# EAGLE board boarduino 4 relay board (EAGLE 5.11)
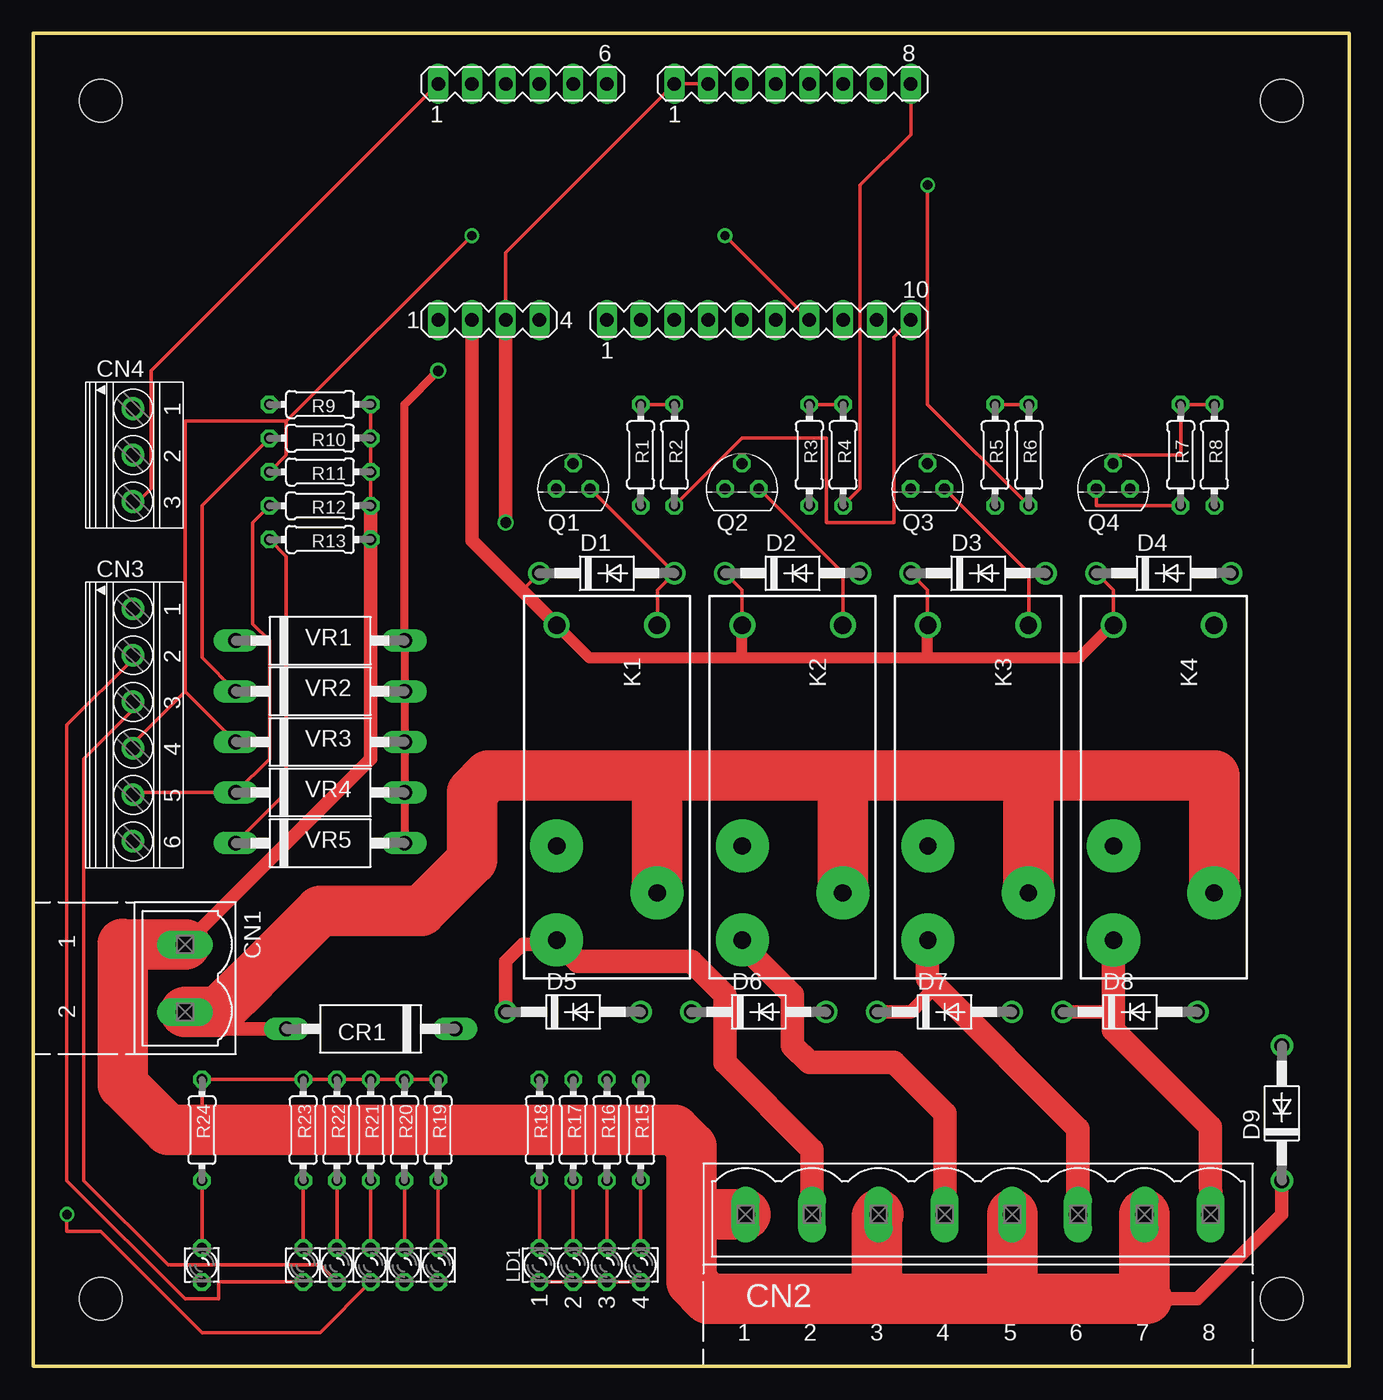
[diagram p0: board, top side]
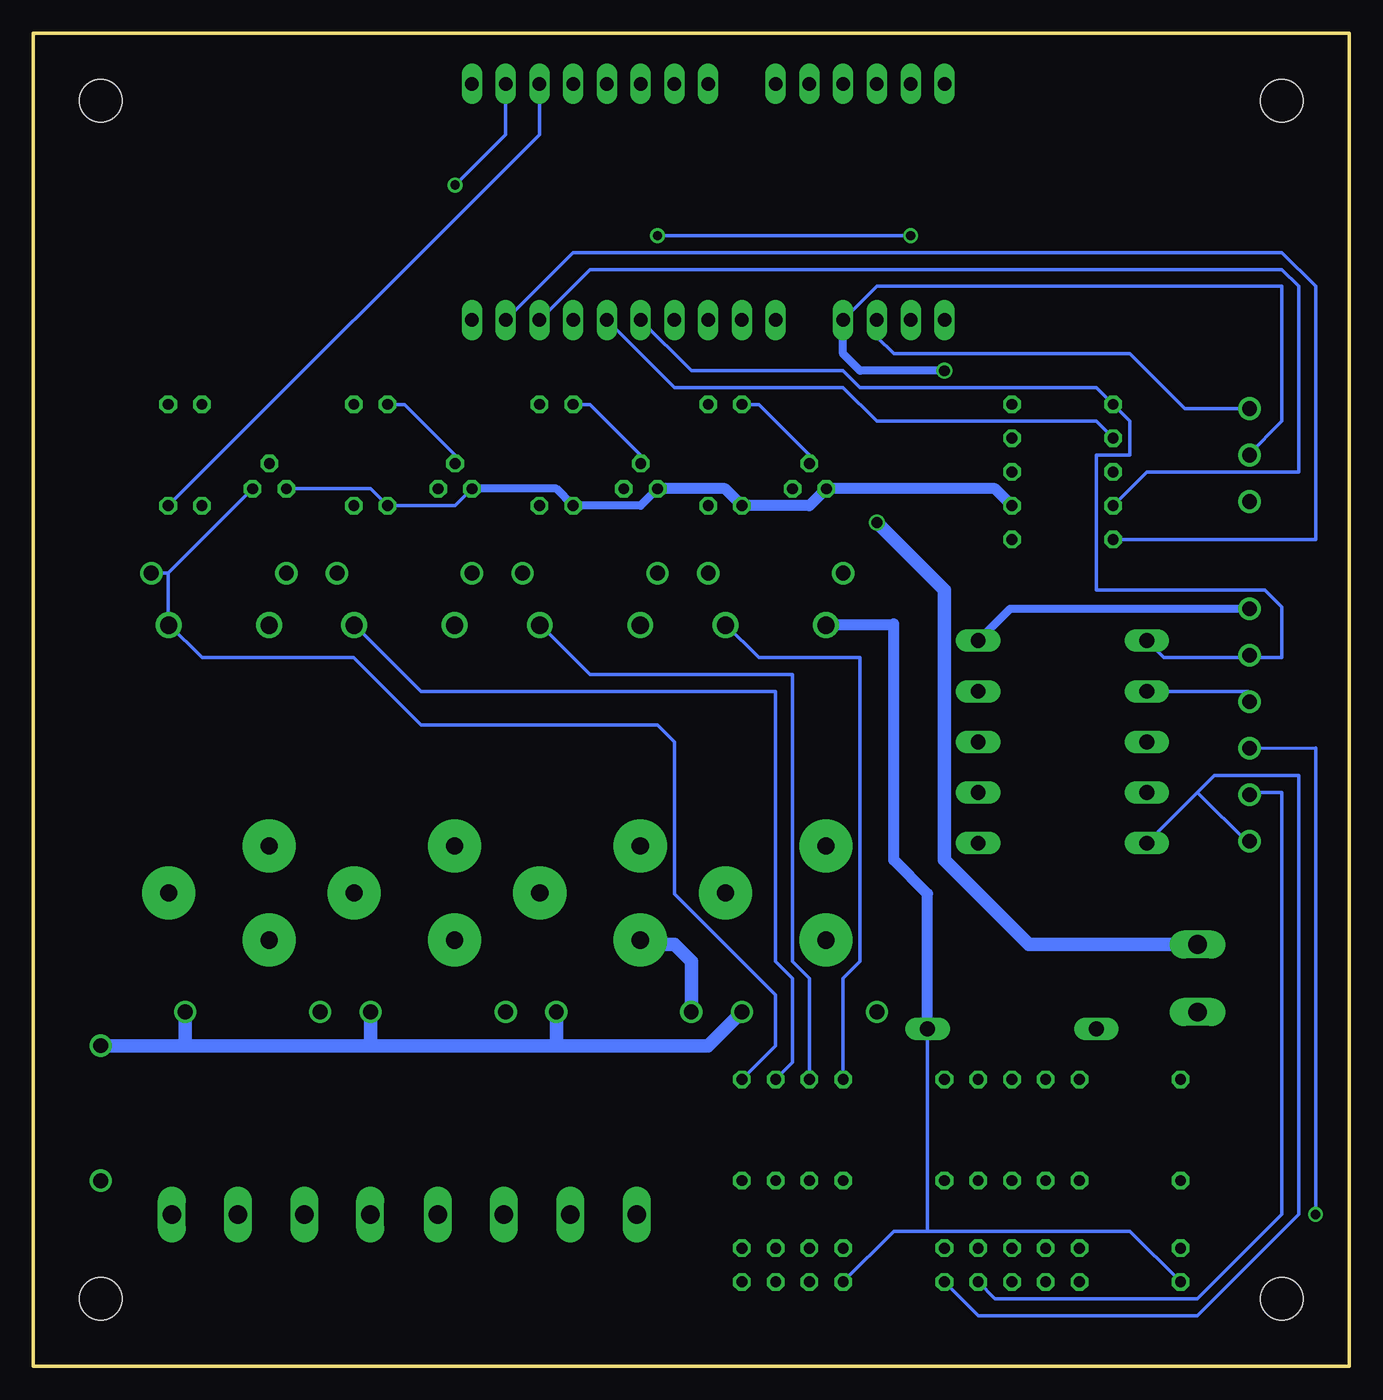
[diagram p1: board, bottom side, seen from below]

Size 99.06 x 100.33 mm. Coordinates in mm from the lower left corner, seen from the top.
Outline: 0,100.33 99.06,100.33 99.06,0 0,0 0,100.33
Copper layers (1*16): Top 0.035mm / dielectric 1.5mm / Bottom 0.035mm
Design rules "default": minimum track width 10mil, minimum drill 24mil, track to track 8mil, track to pad 8mil, pad to pad 8mil, via to via 8mil, smd to smd 8mil, copper to edge 40mil, drill to drill 8mil, minimum pad ring 10mil, minimum via ring 8mil, stop-mask expansion 4mil, vias tented up to drill 0mil, thermal gap 10mil
Holes 3.2 mm at 5.08,5.08 93.98,5.08 93.98,95.25 5.08,95.25

## Footprints (pad centres in the part's own frame; a part is rotated, then mirrored left to right if it is on the bottom)
MSTBV2R = drill 1.397 long: 1 -2.54,0; 2 2.54,0
MSTBV8R = drill 1.397 long: 1 -17.5,0; 2 -12.496,0; 3 -7.492,0; 4 -2.514,0; 5 2.566,0; 6 7.519,0; 7 12.523,0; 8 17.501,0
1751280 = drill 1.1 pad 1.7 round: 1 -8.75,-0.1; 2 -5.25,-0.1; 3 -1.75,-0.1; 4 1.75,-0.1; 5 5.25,-0.1; 6 8.75,-0.1
1751251 = drill 1.1 pad 1.7 round: 1 -3.5,-0.1; 2 0,-0.1; 3 3.5,-0.1
DO15-12 = drill 1.118 long: A 6.35,0; C -6.35,0
DO41-10 = drill 1.118 round: A 5.08,0; C -5.08,0
MA04-1 = drill 1.016 long: 1 -3.81,0; 2 -1.27,0; 3 1.27,0; 4 3.81,0
MA10-1 = drill 1.016 long: 1 -11.43,0; 2 -8.89,0; 3 -6.35,0; 4 -3.81,0; 5 -1.27,0; 6 1.27,0; 7 3.81,0; 8 6.35,0; 9 8.89,0; 10 11.43,0
MA06-1 = drill 1.016 long: 1 -6.35,0; 2 -3.81,0; 3 -1.27,0; 4 1.27,0; 5 3.81,0; 6 6.35,0
MA08-1 = drill 1.016 long: 1 -8.89,0; 2 -6.35,0; 3 -3.81,0; 4 -1.27,0; 5 1.27,0; 6 3.81,0; 7 6.35,0; 8 8.89,0
LZR181 = drill 0.813 octagon: A -1.27,0; K 1.27,0
RT-C/O12A3.5 = drill 1.3 pad 4 round: 11 7.56,3.78; 12 4.02,-3.78; 14 11.1,-3.78 | drill 1.3 round: A1 -12.6,-3.78; A2 -12.6,3.78
LZR184 = drill 0.813 octagon: A1 -1.27,3.81; A2 -1.27,1.27; A3 -1.27,-1.27; A4 -1.27,-3.81; K1 1.27,3.81; K2 1.27,1.27; K3 1.27,-1.27; K4 1.27,-3.81
TO92 = drill 0.813 octagon: 1 1.27,0; 2 0,1.905; 3 -1.27,0
0204/7 = drill 0.813 octagon: 1 -3.81,0; 2 3.81,0

## Placement (x,y rotation side)
CN1  PWR  [MSTBV2R]  11.43,29.21 270 top
CN2  RELAYS  [MSTBV8R]  71.12,11.43 0 top
CN3  INPUTS  [1751280]  7.62,48.26 270 top
CN4  POT  [1751251]  7.62,68.58 270 top
CR1  [DO15-12]  25.4,25.4 180 top
D1  [DO41-10]  43.18,59.69 0 top
D2  [DO41-10]  57.15,59.69 0 top
D3  [DO41-10]  71.12,59.69 0 top
D4  [DO41-10]  85.09,59.69 0 top
D5  [DO41-10]  40.64,26.67 0 top
D6  [DO41-10]  54.61,26.67 0 top
D7  [DO41-10]  68.58,26.67 0 top
D8  [DO41-10]  82.55,26.67 0 top
D9  [DO41-10]  93.98,19.05 90 top
E$1  [MA04-1]  34.29,78.74 0 top
E$2  [MA10-1]  54.61,78.74 0 top
E$3  [MA06-1]  36.83,96.52 0 top
E$4  [MA08-1]  57.15,96.52 0 top
E$8  [LZR181]  27.94,7.62 90 top
E$9  [LZR181]  30.48,7.62 90 top
E$10  [LZR181]  25.4,7.62 90 top
E$13  [LZR181]  22.86,7.62 90 top
E$14  [LZR181]  20.32,7.62 90 top
E$19  [LZR181]  12.7,7.62 90 top
K1  [RT-C/O12A3.5]  43.18,43.18 270 top
K2  [RT-C/O12A3.5]  57.15,43.18 270 top
K3  [RT-C/O12A3.5]  71.12,43.18 270 top
K4  [RT-C/O12A3.5]  85.09,43.18 270 top
LD1  [LZR184]  41.91,7.62 90 top
Q1  [TO92]  40.64,66.04 0 top
Q2  [TO92]  53.34,66.04 0 top
Q3  [TO92]  67.31,66.04 0 top
Q4  [TO92]  81.28,66.04 0 top
R1  [0204/7]  45.72,68.58 90 top
R2  [0204/7]  48.26,68.58 90 top
R3  [0204/7]  58.42,68.58 90 top
R4  [0204/7]  60.96,68.58 90 top
R5  [0204/7]  72.39,68.58 90 top
R6  [0204/7]  74.93,68.58 90 top
R7  [0204/7]  86.36,68.58 90 top
R8  [0204/7]  88.9,68.58 90 top
R9  [0204/7]  21.59,72.39 0 top
R10  [0204/7]  21.59,69.85 0 top
R11  [0204/7]  21.59,67.31 0 top
R12  [0204/7]  21.59,64.77 0 top
R13  [0204/7]  21.59,62.23 0 top
R15  [0204/7]  45.72,17.78 90 top
R16  [0204/7]  43.18,17.78 90 top
R17  [0204/7]  40.64,17.78 90 top
R18  [0204/7]  38.1,17.78 90 top
R19  [0204/7]  30.48,17.78 90 top
R20  [0204/7]  27.94,17.78 90 top
R21  [0204/7]  25.4,17.78 90 top
R22  [0204/7]  22.86,17.78 90 top
R23  [0204/7]  20.32,17.78 90 top
R24  [0204/7]  12.7,17.78 90 top
VR1  [DO15-12]  21.59,54.61 0 top
VR2  [DO15-12]  21.59,50.8 0 top
VR3  [DO15-12]  21.59,46.99 0 top
VR4  [DO15-12]  21.59,43.18 0 top
VR5  [DO15-12]  21.59,39.37 0 top

## Library data of the parts
CN1 CN2 = con-phoenix-500
CN3 CN4 = con-phoenix-350
CR1 D1-D9 VR1-VR5 = diode
E$1-E$4 = con-lstb
E$8-E$10 E$13 E$14 E$19 LD1 = led
K1-K4 = relay
Q1-Q4 = transistor
R1-R13 R15-R24 = resistor

## Nets
S$1: CN3.2 E$2.5 E$14.A R9.1 VR1.C
S$2: Q1.2 R1.2 R2.2
S$3: E$2.10 R2.1
S$4: D1.A K1.A2 Q1.1 R18.2
S$5: D5.A D6.A D7.A D8.A D9.A
S$6: CN1.2 CR1.A K1.11 K2.11 K3.11 K4.11
S$7: Q2.2 R3.2 R4.2
S$8: Q3.2 R5.2 R6.2
S$9: Q4.2 R7.2 R8.2
S$10: E$4.8 R4.1
S$11: E$4.7 R6.1
S$12: E$4.6 R8.1
S$13: D2.A K2.A2 Q2.1 R17.2
S$14: D3.A K3.A2 Q3.1 R16.2
S$15: D4.A K4.A2 Q4.1 R15.2
S$17: CN3.1 CN4.2 E$1.4 VR1.A VR2.A VR3.A VR4.A VR5.A
S$18: CN4.3 E$3.1
S$20: CN1.1 CN2.1 CN2.3 CN2.5 CN2.7 CN4.1 D9.C E$1.3 E$4.1 E$4.2 Q1.3 Q2.3 Q3.3 Q4.3 R1.1 R3.1 R5.1 R7.1 R9.2 R10.2 R11.2 R12.2 R13.2 R19.2 R20.2 R21.2 R22.2 R23.2 R24.2
S$21: CN3.6 E$2.9 E$9.A R13.1 VR5.C
S$22: CN3.3 E$2.6 E$13.A R10.1 VR2.C
S$23: CN3.4 E$2.7 E$10.A R11.1 VR3.C
S$24: CN3.5 E$2.8 E$8.A R12.1 VR4.C
S$25: CR1.C D1.C D2.C D3.C D4.C E$1.2 E$19.A K1.A1 K2.A1 K3.A1 K4.A1 LD1.A1 LD1.A2 LD1.A3 LD1.A4
S$26: LD1.K4 R15.1
S$27: LD1.K3 R16.1
S$28: LD1.K2 R17.1
S$29: LD1.K1 R18.1
S$30: E$9.K R19.1
S$31: E$8.K R20.1
S$32: E$10.K R21.1
S$33: E$13.K R22.1
S$34: E$14.K R23.1
S$36: E$19.K R24.1
S$38: CN2.2 D5.C K1.14
S$39: CN2.4 D6.C K2.14
S$40: CN2.6 D7.C K3.14
S$41: CN2.8 D8.C K4.14

## Tracks (layer width: path | path; a pad name or v marks a point on that pad's centre or on a via)
S$1
  Top 0.254: E$14.A 13.97,6.35 13.97,5.08 11.43,5.08 2.54,13.97 2.54,48.26 7.62,53.34 CN3.2
  Bottom 0.254: VR1.C 13.97,53.34 7.62,53.34 | 7.62,53.34 5.08,53.34 5.08,57.15 6.35,58.42 19.05,58.42 19.05,68.58 16.51,68.58 16.51,71.12 R9.1 19.05,73.66 36.83,73.66 38.1,74.93 49.53,74.93 E$2.5 | CN3.2 7.62,53.34
S$2
  Top 0.254: R1.2 R2.2
  Bottom 0.254: R1.2 44.45,72.39 40.64,68.58 Q1.2
S$3
  Top 0.254: R2.1 53.34,69.85 59.69,69.85 59.69,63.5 64.77,63.5 64.77,77.47 E$2.10
S$4
  Top 0.254: Q1.1 D1.A 46.99,58.42 46.99,55.88 K1.A2
  Bottom 0.254: R18.2 38.1,29.21 36.83,30.48 36.83,53.34 44.45,53.34 46.99,55.88 K1.A2
S$5
  Bottom 1.016: 87.63,24.13 D8.A | 73.66,24.13 D7.A | 73.66,24.13 87.63,24.13 | 59.69,24.13 D6.A | 59.69,24.13 73.66,24.13 | 59.69,24.13 48.26,24.13 D5.A | 87.63,24.13 D9.A
S$6
  Top 0.254: 16.51,29.21 17.78,27.94
  Top 1.016: CR1.A 12.7,25.4 CN1.2
  Top 3.81: CN1.2 13.97,26.67 16.51,29.21 21.59,34.29 29.21,34.29 33.02,38.1 33.02,43.18 34.29,44.45 46.99,44.45 | 46.99,44.45 60.96,44.45 | 60.96,44.45 74.93,44.45 | 74.93,44.45 88.9,44.45 88.9,35.59 | 88.9,35.59 88.9,35.56 | 88.9,35.59 K4.11 | K3.11 74.9,44.42 74.93,44.45 | K2.11 60.93,44.42 60.96,44.45 | K1.11 46.96,44.42 46.99,44.45
S$7
  Top 0.254: R3.2 R4.2
  Bottom 0.254: R3.2 57.15,72.39 53.34,68.58 Q2.2
S$8
  Top 0.254: R5.2 R6.2
  Bottom 0.254: R5.2 71.12,72.39 67.31,68.58 Q3.2
S$9
  Top 0.254: Q4.2 81.28,68.58 86.36,68.58 R7.2 R8.2
S$10
  Top 0.254: R4.1 62.23,66.04 62.23,88.9 66.04,92.71 E$4.8
S$11  (via drill 0.7)
  Top 0.254: R6.1 67.31,72.39 v67.31,88.9
  Bottom 0.254: v67.31,88.9 63.5,92.71 E$4.7
S$12
  Bottom 0.254: R8.1 60.96,92.71 E$4.6
S$13
  Top 0.254: 60.96,59.69 Q2.1 | 60.96,59.69 60.96,55.88 K2.A2 | 60.96,59.69 D2.A
  Bottom 0.254: R17.2 40.64,29.21 41.91,30.48 41.91,52.07 57.15,52.07 60.96,55.88 K2.A2
S$14
  Top 0.254: 74.93,59.69 Q3.1 | 74.93,59.69 74.93,55.88 K3.A2 | 74.93,59.69 D3.A
  Bottom 0.254: K3.A2 74.93,55.88 69.85,50.8 43.18,50.8 43.18,30.48 41.91,29.21 41.91,22.86 R16.2
S$15
  Bottom 0.254: 88.9,59.69 Q4.1 | 88.9,59.69 D4.A | 88.9,55.88 86.36,53.34 74.93,53.34 69.85,48.26 52.07,48.26 50.8,46.99 50.8,35.56 43.18,27.94 43.18,24.13 R15.2 | 88.9,55.88 88.9,59.69 | 88.9,55.88 K4.A2
S$17  (via drill 0.8)
  Top 0.61: VR5.A VR4.A VR3.A VR2.A VR1.A 27.94,72.39 v30.48,74.93
  Bottom 0.254: E$1.4 35.56,81.28 5.08,81.28 5.08,71.12 7.62,68.58 CN4.2
  Bottom 0.61: E$1.4 38.1,76.2 36.83,74.93 v30.48,74.93 | CN3.1 25.54,57.01 VR1.A
S$18
  Top 0.254: CN4.3 7.62,64.77 8.89,66.04 8.89,74.93 E$3.1
S$20  (via drill 0.8)
  Top 0.254: E$4.2 E$4.1 35.56,83.82 E$1.3 | R7.1 80.01,64.77 Q4.3 | R9.2 R10.2 R11.2 R12.2 | 12.7,17.78 R24.2 R23.2 R22.2 R21.2 R20.2 R19.2
  Top 1.016: v35.56,63.5 E$1.3 | R12.2 R13.2 25.4,45.72 CN1.1 | D9.C 93.98,11.43 87.63,5.08 83.82,5.08
  Top 3.81: CN2.7 83.64,5.26 83.82,5.08 73.66,5.08 | CN2.5 73.69,5.11 73.66,5.08 | CN2.3 63.5,11.3 63.5,5.08 | 63.5,5.08 73.66,5.08 | 63.5,5.08 50.8,5.08 49.53,6.35 49.53,11.43 | CN1.1 6.76,31.75 6.74,31.78 6.74,21.2 10.16,17.78 12.7,17.78 48.26,17.78 49.53,16.51 49.53,11.43 | 49.53,11.43 CN2.1
  Bottom 0.254: Q4.3 73.66,66.04 R5.1 67.31,64.77 Q3.3 | CN4.1 12.39,72.08 16.51,76.2 34.29,76.2 35.56,77.47 E$1.3
  Bottom 0.61: Q3.3 59.69,66.04 R3.1 53.34,64.77 Q2.3
  Bottom 0.813: Q2.3 46.99,66.04 R1.1 40.64,64.77 Q1.3 26.67,66.04 R12.2
  Bottom 1.016: v35.56,63.5 30.48,58.42 30.48,38.1 24.13,31.75 CN1.1
S$21
  Top 0.254: R13.1 19.05,60.96 19.05,43.18 VR5.C
  Bottom 0.254: CN3.6 7.62,39.37 11.43,43.18 | 11.43,43.18 VR5.C | E$9.A 27.94,3.81 11.43,3.81 3.81,11.43 3.81,44.45 10.16,44.45 11.43,43.18 | E$2.9 58.42,83.82 5.08,83.82 2.54,81.28 2.54,62.23 R13.1
S$22
  Top 0.254: R10.1 12.7,64.77 12.7,53.34 VR2.C | E$13.A 21.59,7.62 10.16,7.62 3.81,13.97 3.81,45.72 7.62,49.53 CN3.3
  Bottom 0.254: VR2.C 7.62,50.8 CN3.3 | E$2.6 50.8,73.66 38.1,73.66 35.56,71.12 19.05,71.12 R10.1
S$23  (via drill 0.7)
  Top 0.254: R11.1 19.05,68.58 19.05,71.12 | 19.05,71.12 11.43,71.12 11.43,50.8 | 11.43,50.8 VR3.C | 11.43,50.8 7.62,46.99 CN3.4 | 19.05,71.12 v33.02,85.09 | v52.07,85.09 E$2.7 | E$10.A 21.59,2.54 12.7,2.54 5.08,10.16 2.54,10.16 v2.54,11.43
  Bottom 0.254: v33.02,85.09 v52.07,85.09 | v2.54,11.43 2.54,46.53 CN3.4
S$24
  Top 0.254: R12.1 16.51,63.5 16.51,55.88 17.78,54.61 17.78,45.72 VR4.C 7.62,43.18 CN3.5
  Bottom 0.254: E$8.A 26.67,5.08 11.43,5.08 5.08,11.43 5.08,43.18 7.62,43.18 CN3.5 | E$2.8 57.15,82.55 5.08,82.55 3.81,81.28 3.81,67.31 15.24,67.31 R12.1
S$25
  Top 0.254: LD1.A1 LD1.A2 LD1.A3 LD1.A4 | D4.C 81.28,58.42 81.28,55.88 K4.A1 | D3.C 67.31,58.42 67.31,55.88 K3.A1 | 36.8,58.38 D1.C | D2.C 53.34,58.42 53.34,55.88 K2.A1
  Top 0.813: K1.A1 41.84,53.34 53.34,53.34 | 53.34,53.34 67.31,53.34 | 67.31,53.34 78.74,53.34 81.18,55.78 K4.A1 | K3.A1 67.31,55.75 67.31,53.34 | K2.A1 53.34,55.75 53.34,53.34
  Top 1.016: E$1.2 33.02,62.16 36.8,58.38 K1.A1
  Bottom 0.254: E$19.A 16.51,10.16 31.75,10.16 | 31.75,10.16 34.29,10.16 LD1.A1 | 31.75,10.16 CR1.C | K1.A1 39.37,55.88
  Bottom 0.813: CR1.C 31.75,35.56 34.29,38.1 34.29,55.88 34.39,55.78 K1.A1
S$26
  Top 0.254: LD1.K4 R15.1
S$27
  Top 0.254: LD1.K3 R16.1
S$28
  Top 0.254: LD1.K2 R17.1
S$29
  Top 0.254: LD1.K1 R18.1
S$30
  Top 0.254: E$9.K R19.1
S$31
  Top 0.254: E$8.K R20.1
S$32
  Top 0.254: E$10.K R21.1
S$33
  Top 0.254: E$13.K R22.1
S$34
  Top 0.254: E$14.K R23.1
S$36
  Top 0.254: E$19.K R24.1
S$38
  Top 1.016: D5.C 35.56,30.48 36.83,31.75 39.07,31.75 K1.14
  Top 1.778: CN2.2 58.62,16.31 52.07,22.86 52.07,27.94 49.53,30.48 41,30.48 K1.14
S$39
  Top 1.778: CN2.4 68.61,19.02 64.77,22.86 58.42,22.86 57.15,24.13 57.15,27.94 53.34,31.75 53.34,32.05 K2.14
  Bottom 1.016: D6.C 49.53,30.48 50.8,31.75 53.04,31.75 K2.14
S$40
  Top 0.254: 67.31,30.48 K3.14
  Top 1.016: D7.C 66.04,26.67 67.94,28.57
  Top 1.778: CN2.6 78.64,17.88 67.94,28.57 67.31,29.21 67.31,30.48 67.31,32.05 K3.14
S$41
  Top 1.016: 81.31,26.67 D8.C
  Top 1.778: K4.14 81.31,26.67 81.31,25.31 88.61,18.01 88.61,15.25 CN2.8